# Altium PCB NODE.PcbDoc
Units mil, origin at the board's own origin, x right, y up, seen from the top; angles counter-clockwise.
Board outline 3035 x 2300 mil, 2 copper layers (Top Layer, Bottom Layer); 69 components, 70 nets, 314 pads, 86 vias.
Unrouted connection lines stored in the file: 2.
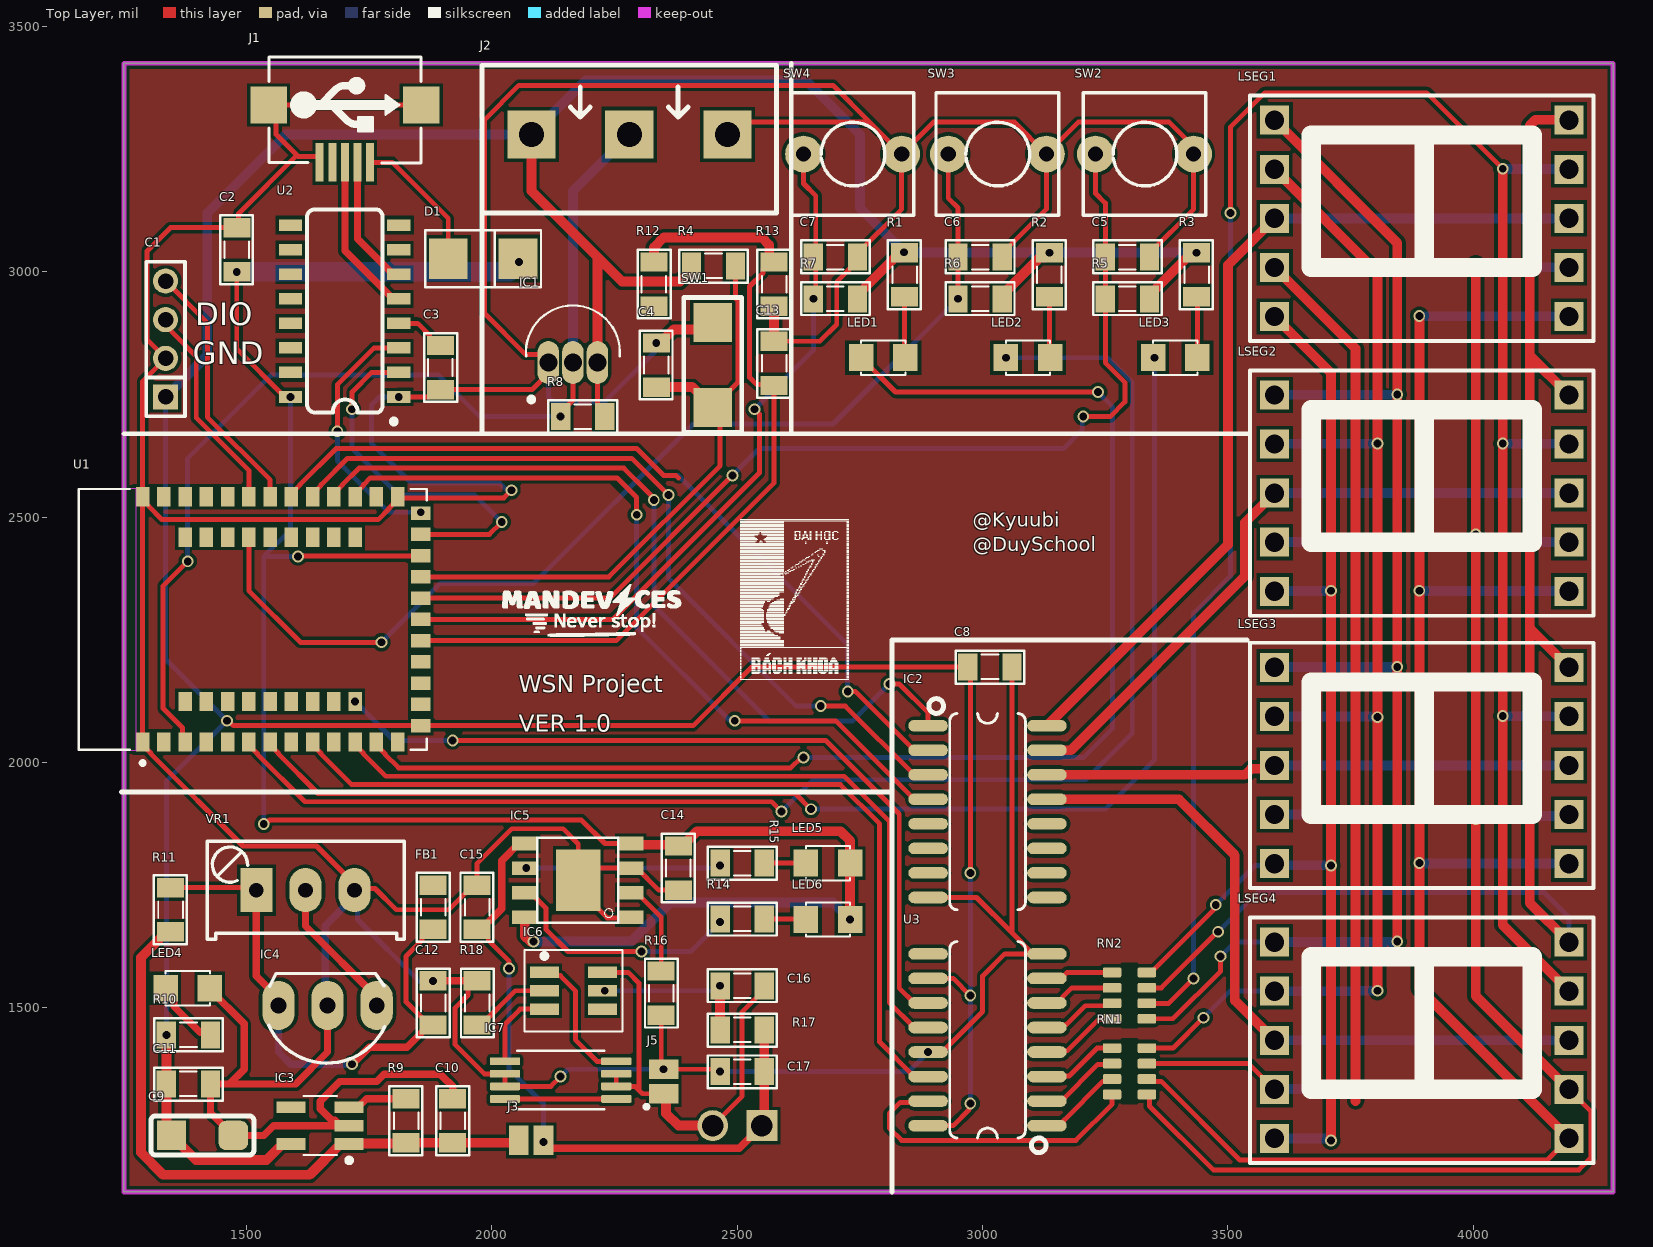
[diagram p0: Top Layer view]
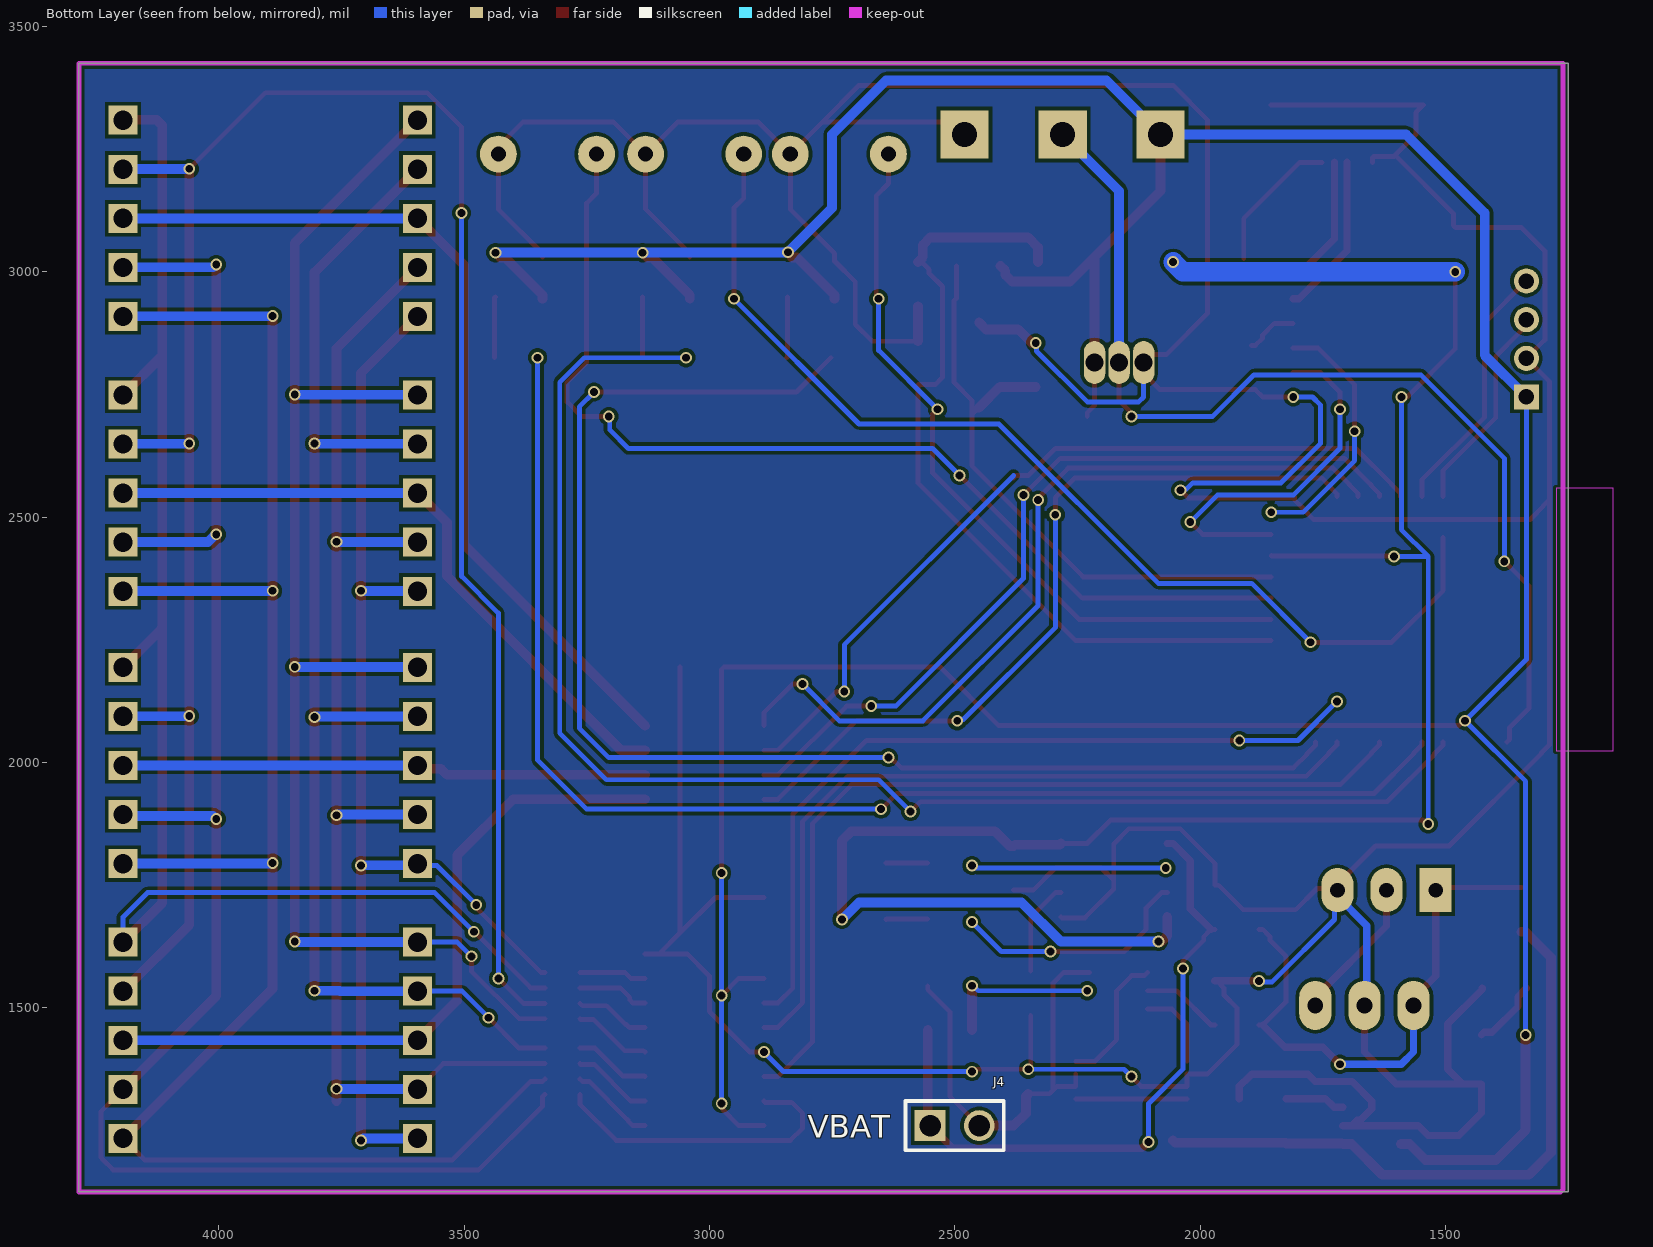
[diagram p1: Bottom Layer view, seen from below]
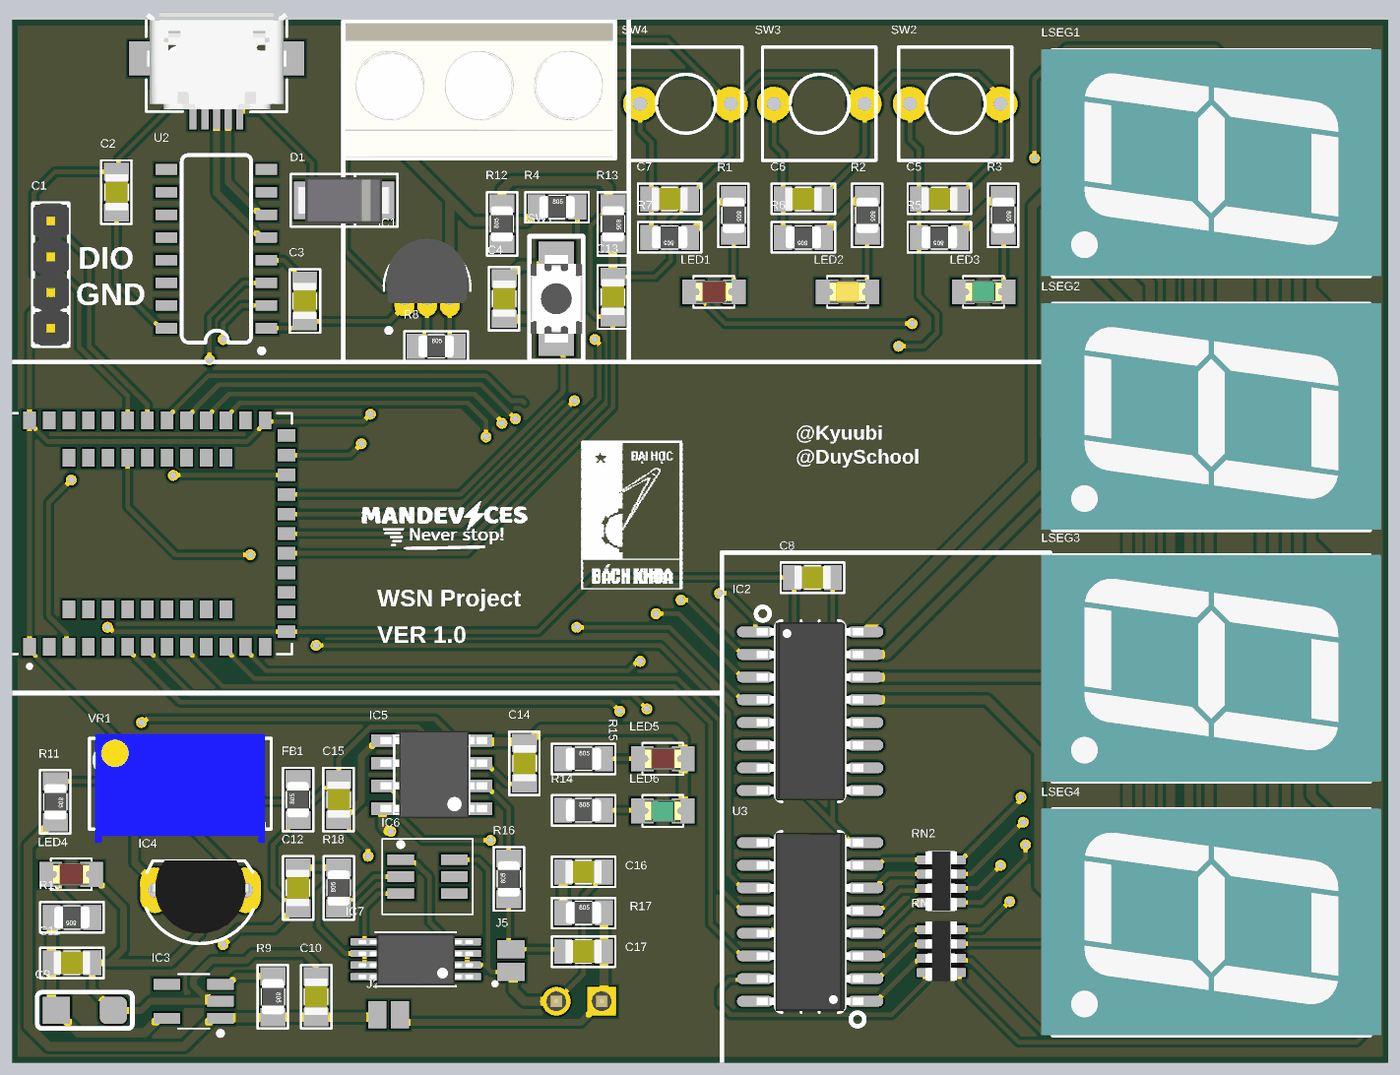
[diagram p2: 3D render of the assembled board from above, using the file's embedded part models]

## Layer stack, top to bottom
Top Solder: solder mask 0.4, Solder Resist, Dk 3.5
Top Layer: signal copper 1.4
Dielectric 1: dielectric 12.6, FR-4, Dk 4.8
Bottom Layer: signal copper 1.4
Bottom Solder: solder mask 0.4, Solder Resist, Dk 3.5

## Board outline
1250,1125 1250,3425 4285,3425 4285,1125

## Design rules (kind name [scope] priority, off if disabled: settings)
Clearance [All] p1: gap=7 ignorepadtopadclearanceinfootprint=TRUE
DiffPairsRouting [All] p1: maxlimit=10 minlimit=10 mostfreqgap=10 toplayer_minwidth=15 toplayer_maxwidth=15 toplayer_prefwidth=15 bottomlayer_minwidth=15 bottomlayer_maxwidth=15 bottomlayer_prefwidth=15 maxuncoupledlength=500
PolygonConnect [All] p1: connectstyle=Relief reliefconductorwidth=10 reliefentries=4 polygonreliefangle="90 Angle" airgapwidth=10
RoutingVias [All] p1: holewidth=16 width=24 viastyle="Through Hole" minholewidth=16 minwidth=24 maxholewidth=20 maxwidth=28
SolderMaskExpansion [All] p1: expansion=4 istentingtop=FALSE
Width [All] p1: maxlimit=40 minlimit=10 preferedwidth=20
29 further rules are at their usual default settings.

## Classes and differential pairs
component class U_Sensor: IC1 J2 R8
component class U_Power: C9 C10 C11 C12 C13 C14 C15 C16 C17 FB1 IC3 IC4 IC5 IC6 IC7 J3 J4 J5 LED4 LED5 LED6 R9 R10 R11 R12 R13 R14 R15 R16 R17 R18 VR1
component class U_Main: C1 C2 C3 C4 C5 C6 C7 D1 J1 LED1 LED2 LED3 R1 R2 R3 R4 R5 R6 R7 SW1 SW2 SW3 SW4 U1 U2
component class U_Display: C8 IC2 LSEG1 LSEG2 LSEG3 LSEG4 RN1 RN2 U3
differential pair D0: +D0_P -D0_N

## Components (designator, comment, footprint, x,y, rotation, side; value= is the part's Value field where it differs from the comment)
C1 "ST_Link" J4-D1T 1335,2863.11 r90 top
C2 "10uF" CAP_0805 1480,3045 r270 top value=33p
C3 "100nF" CAP_0805 1895,2805 r90 top value=33p
C4 "10uF" CAP_0805 2335,2810 r270 top value=33p
C5 "10uF" CAP_0805 3295,3030 r180 top value=33p
C6 "10uF" CAP_0805 2995,3030 r180 top value=33p
C7 "10uF" CAP_0805 2700,3030 r180 top value=33p
C8 "100nF" CAP_0805 3015,2195 r0 top value=33p
C9 "220uF" CAP_TANTALUM_3216 1410,1240 r0 top
C10 "470nF" CAP_0805 1920,1270 r90 top value=33p
C11 "100nF" CAP_0805 1381.5,1345 r0 top value=33p
C12 "100nF" CAP_0805 1880,1510 r90 top value=33p
C13 "100nF" CAP_0805 2575,2813.44 r270 top value=33p
C14 "100nF" CAP_0805 2380,1785 r270 top value=33p
C15 "100nF" CAP_0805 1970,1705 r270 top value=33p
C16 "100nF" CAP_0805 2510,1545 r180 top value=33p
C17 "100nF" CAP_0805 2510,1370 r0 top value=33p
D1 "Diode SMD" DIO-214AC(SMA) 1985,3025 r180 top value=1N5007
FB1 "Ferrit Bead" RES-SMD-0805 1880,1705 r90 top
IC1 "DSB18B20" TO-92 2170,2835 r0 top
IC2 "ULN2003A" SOIC16 3010,1900 r0 top
IC3 "RT9013" SOT23-5 1650,1260 r180 top
IC4 "TL431" qto-92 1665,1505 r180 top
IC5 "TP4056" TP4056 2175,1760 r180 top
IC6 "DW01A" SOT23-6 2165.94,1535 r0 top
IC7 "FS8205A" FS8205A 2140,1355 r180 top
J1 "Debug" USB-M1 1700.51,3223.16 r0 top
J2 "DSB" KF3-5.08 2480,3280 r180 top
J3 "Jumper2" JUMPER2 2055,1230 r180 top
J4 "VBAT_IN" JP2-D1T 2550,1260 r180 bottom
J5 "Jumper2" JUMPER2 2350,1375 r90 top
LED1 "LED" LED-0805-Red 2842.5,2825 r180 top value="LED 3 ly Single Colour"
LED2 "LED" LED-0805-Yellow 3137.5,2825 r180 top value="LED 3 ly Single Colour"
LED3 "LED" LED-0805-Green 3437.5,2825 r180 top value="LED 3 ly Single Colour"
LED4 "" LED-0805-Red 1335,1540 r0 top value="LED 3 ly Single Colour"
LED5 "LED" LED-0805-Red 2730,1795 r180 top value="LED 3 ly Single Colour"
LED6 "LED" LED-0805-Green 2730,1680 r180 top value="LED 3 ly Single Colour"
LSEG1 "7SEG-K" LED7SEG 3895,3110 r270 top
LSEG2 "7SEG-K" LED7SEG 3895,2550 r270 top
LSEG3 "7SEG-K" LED7SEG 3895,1995 r270 top
LSEG4 "7SEG-K" LED7SEG 3895,1435 r270 top
R1 "1k" RES-SMD-0805 2841,2994 r270 top
R2 "1k" RES-SMD-0805 3136,2994 r270 top
R3 "1k" RES-SMD-0805 3436,2994 r270 top
R4 "10k" RES-SMD-0805 2451.56,3012 r0 top
R5 "10k" RES-SMD-0805 3295,2945 r180 top
R6 "10k" RES-SMD-0805 2995,2945 r180 top
R7 "10k" RES-SMD-0805 2700,2945 r180 top
R8 "4k7" RES-SMD-0805 2185,2705 r0 top
R9 "10k" RES-SMD-0805 1825,1270 r270 top
R10 "1k" RES-SMD-0805 1381.5,1445 r180 top
R11 "10k" RES-SMD-0805 1345,1700 r270 top
R12 "30k" RES-SMD-0805 2330,2975 r90 top
R13 "100k" RES-SMD-0805 2575,2975 r270 top
R14 "1k" RES-SMD-0805 2510,1681.5 r0 top
R15 "1k" RES-SMD-0805 2510,1795 r0 top
R16 "1k2" RES-SMD-0805 2345,1530 r90 top
R17 "10R" RES-SMD-0805 2510,1455 r0 top
R18 "1k" RES-SMD-0805 1970,1510 r90 top
RN1 "RP330" RN4-0805 3299.25,1370.75 r180 top
RN2 "RP330" RN4-0805 3299.25,1525 r180 top
SW1 "SW" "SW 3x2x4" 2450,2810 r270 top value="SW chip 2 pin"
SW2 "SW" SW2 3430,3240 r180 top value="SW chip 2 pin"
SW3 "SW" SW2 3130,3240 r180 top value="SW chip 2 pin"
SW4 "SW" SW2 2835,3240 r180 top value="SW chip 2 pin"
U1 "Nrf52840" NRF52840 1387.48,2281.69 r90 top
U2 "CH340C" SOP-16 1700,2920 r90 top
U3 "74HC595" SOIC16 3010,1435 r180 top
VR1 "10K" VR1 1520,1740 r0 top value="VR 10K"

## Footprints (in the part's own frame and the unit in brackets; to place one, negate y for a bottom-side part, rotate by r counter-clockwise, add the part's x,y. Pads: shape width x height; smd on the part's side, far side on the other; paste and mask are expansions set on the pad)
CAP_0805 [mil]
  rect 39.37x55 smd: 1(-45,0) 2(45,0)
  silkscreen extent -70,-34 70,33, body extent -40,-25 40,25, height 24
CAP_TANTALUM_3216 [mil]
  rect 60x60 smd: 1(-62.99,0)
  rrect50% 60x60 smd: 2(62.99,0)
  silkscreen extent -105,-40 105,40, body extent -67,-35 67,35, height 67
DIO-214AC(SMA) [mm] "DO-214AC Diode Smallest Size"
  rect 2x2.1 smd: 1(1.88,-0.051) 2(-1.732,-0.051)
  silkscreen extent -2.92,-1.52 3.07,1.42, body extent -2.5,-1.35 2.7,1.25, height 2.4
FS8205A [mm]
  rrect25% 1.56x0.4 smd: 1(-2.88,1.031) 2(-2.88,0.381) 3(-2.88,-0.269) 4(-2.88,-0.919) 5(2.88,-0.919) 6(2.88,-0.269) 7(2.88,0.381) 8(2.88,1.031)
  silkscreen extent -4.54,-1.46 2.25,1.57, body extent -3.2,-1.4 3.2,1.53, height 1.2
J4-D1T [mm] "4 pins, 1 row, straight, gold plating"
  rect 1.3x1.3 hole 0.8: 1(-3,0)
  round 1.3 hole 0.8: 2(-1,0) 3(1,0) 4(3,0)
  silkscreen extent -4,-1 4,1, body extent -4,-1 4,1, height 6.01
JP2-D1T [mm] "2 pins, 1 row, straight, gold plating"
  rect 1.6x1.6 hole 1.1: 1(0,0)
  round 1.6 hole 1.1: 2(2.54,0)
  silkscreen extent -1.27,-1.27 3.81,1.27, body extent -1.27,-1.27 3.81,1.27, height 8.54
JUMPER2 [mil]
  rect 40x60 smd: 1(-50,0) 2(0,0)
KF3-5.08 [mm]
  rect 2.5x2.5 hole 1.3: 1(0,0) 2(5.08,0) 3(10.147,0)
  silkscreen extent -2.54,-3.58 12.7,4.06, body extent -2.42,-3.51 12.58,3.99, height 10
LED7SEG [mm] "LED7SEG"
  round 1.524 on Top Overlay: 0(4.724,-5.334)
  rect 1.5x1.5 hole 1: 1(-5.055,-7.62) 2(-2.515,-7.62) 3(0.025,-7.62) 4(2.565,-7.62) 5(5.105,-7.62) 6(5.105,7.62) 7(2.565,7.62) 8(0.025,7.62) 9(-2.515,7.62) 10(-5.055,7.62)
  silkscreen extent -6.32,-8.89 6.38,8.89, body extent -6.35,-9.52 6.35,9.53, height 8.03
LED-0805-Green [mil]
  rect 50x55 smd: 1(0,0) 2(90,0)
  silkscreen extent 0,-35 90,35, body extent 5,-25 85,25, height 43
LED-0805-Red [mil]
  rect 50x55 smd: 1(0,0) 2(90,0)
  silkscreen extent 0,-35 90,35, body extent 5,-25 85,25, height 43
LED-0805-Yellow [mil]
  rect 50x55 smd: 1(0,0) 2(90,0)
  silkscreen extent 0,-35 90,35, body extent 5,-25 85,25, height 43
NRF52840 [mm] "SoC Module"
  rect 1x0.7 smd: 1(-6.096,2.525) 2(-6.096,1.425) 3(-6.096,0.325) 4(-6.096,-0.775) 5(-6.096,-1.875) 6(-6.096,-2.975) 7(-6.096,-4.075) 8(-6.096,-5.175) 9(-6.096,-6.275) 10(-6.096,-7.375) 11(-6.096,-8.475) 12(-6.096,-9.575) 13(-6.096,-10.675) 25(6.604,-10.675) 26(6.604,-9.575) 27(6.604,-8.475) 28(6.604,-7.375) 29(6.604,-6.275) 30(6.604,-5.175) 31(6.604,-4.075) 32(6.604,-2.975) 33(6.604,-1.875) 34(6.604,-0.775) 35(6.604,0.325) 36(6.604,1.425) 37(6.604,2.525) 38(-3.996,0.325) 39(-3.996,-0.775) 40(-3.996,-1.875) 41(-3.996,-2.975) 42(-3.996,-4.075) 43(-3.996,-5.175) 44(-3.996,-6.275) 45(-3.996,-7.375) 46(-3.996,-8.475) 47(4.504,0.325) 48(4.504,-0.775) 49(4.504,-1.875) 50(4.504,-2.975) 51(4.504,-4.075) 52(4.504,-5.175) 53(4.504,-6.275) 54(4.504,-7.375) 55(4.504,-8.475)
  rect 0.7x1 smd: 14(-5.246,-11.875) 15(-4.146,-11.875) 16(-3.046,-11.875) 17(-1.946,-11.875) 18(-0.846,-11.875) 19(0.254,-11.875) 20(1.354,-11.875) 21(2.454,-11.875) 22(3.554,-11.875) 23(4.654,-11.875) 24(5.754,-11.875)
  Keep-Out Layer region: 7.054,2.875 -6.546,2.875 -6.546,5.825 7.054,5.825
  Keep-Out Layer region: 7.054,2.875 -6.546,2.875 -6.546,5.825 7.054,5.825
  Keep-Out Layer region: 7.054,2.875 -6.546,2.875 -6.546,5.825 7.054,5.825
  silkscreen extent -7.28,-12.17 7,5.82
qto-92 [mil] "TO-92"
  oval 66x100 hole 32: 1(-100,0) 2(0,0) 3(100,0)
  silkscreen extent -117,-65 120,118, body extent -109,-66 109,95, height 245
RES-SMD-0805 [mil]
  rect 39.37x55 smd: 1(-45,0) 2(45,0)
  silkscreen extent -70,-34 70,33, body extent -39,-25 39,25, height 31
RN4-0805 [mm]
  round 0.254 on Mech15: 0(0,0)
  rrect25% 0.95x0.5 smd: 1(-0.9,1.2) 2(-0.9,0.4) 3(-0.9,-0.4) 4(-0.9,-1.2) 5(0.9,-1.2) 6(0.9,-0.4) 7(0.9,0.4) 8(0.9,1.2)
  Top Layer pour cut-out: -0.4,1.7 0.4,1.7 0.4,-1.7 -0.4,-1.7
  body extent -0.87,-1.68 0.88,1.67, height 0.7
SOIC16 [mm]
  oval 2.05x0.6 smd: 1(-3.075,4.445) 2(-3.075,3.175) 3(-3.075,1.905) 4(-3.075,0.635) 5(-3.075,-0.635) 6(-3.075,-1.905) 7(-3.075,-3.175) 8(-3.075,-4.445) 9(3.075,-4.445) 10(3.075,-3.175) 11(3.075,-1.905) 12(3.075,-0.635) 13(3.075,0.635) 14(3.075,1.905) 15(3.075,3.175) 16(3.075,4.445)
  silkscreen extent -3.03,-5.08 1.96,5.85, body extent -3,-5 3,5, height 1.75
SOP-16 [mm]
  rect 0.6x1.2 smd: 1(-4.445,-2.8) 2(-3.175,-2.8) 3(-1.905,-2.8) 4(-0.635,-2.8) 5(0.635,-2.8) 6(1.905,-2.8) 7(3.175,-2.8) 8(4.445,-2.8) 9(4.445,2.8) 10(3.175,2.8) 11(1.905,2.8) 12(0.635,2.8) 13(-0.635,2.8) 14(-1.905,2.8) 15(-3.175,2.8) 16(-4.445,2.8)
  silkscreen extent -5.84,-2.67 5.26,1.95, body extent -4.95,-3.47 4.95,3.47, height 1.75
SOT23-5 [mm] "SOT23, 5-Leads, Body 3.0x3.0mm (max), Pitch 0.95mm, IPC Medium Density"
  rect 1.5x0.6 smd: 1(-1.5,0.95) 2(-1.5,0) 3(-1.5,-0.95) 4(1.5,-0.95) 5(1.5,0.95)
  silkscreen extent -1.63,-1.52 0.87,1.92, body extent -1.75,-1.52 1.75,1.53, height 1.45
SOT23-6 [mm] "SOT23, 5-Leads, Body 3.0x3.0mm (max), Pitch 0.95mm, IPC Medium Density"
  rect 1.5x0.6 smd: 1(-1.5,0.95) 2(-1.5,0) 3(-1.5,-0.95) 4(1.5,-0.95) 5(1.5,0) 6(1.5,0.95)
  silkscreen extent -2.54,-2.11 2.54,2.11, body extent -1.75,-1.52 1.75,1.53, height 1.45
SW2 [mil] "SW button 2pin, 250x 250 mil"
  round 75 hole 31: 1(0,0) 2(200,0)
  silkscreen extent -25,-125 225,125
"SW 3x2x4" [mm]
  rect 2x2 smd: 1(-2.2,0) 2(2.2,0)
  silkscreen extent -3.5,-1.5 3.5,1.5, body extent -2.45,-1.45 2.45,1.45, height 2
TO-92 [mm]
  oval 1.11x2.22 hole 0.93: 1(-1.397,-0.506) 2(-0.127,-0.506) 3(1.143,-0.506)
  silkscreen extent -2.56,-2.54 2.3,2.45, body extent -2.41,-0.89 2.16,2.73, height 20.45
TP4056 [mm]
  rect 1.3x0.7 smd: 1(-2.75,1.905) 2(-2.75,0.635) 3(-2.75,-0.635) 4(-2.75,-1.905) 5(2.75,-1.905) 6(2.75,-0.635) 7(2.75,0.635) 8(2.75,1.905)
  rect 2.3x3.2 smd: 3(-0.025,0)
  silkscreen extent -2.1,-2.2 2.1,2.2, body extent -3.13,-2.45 2.87,2.45, height 1.75
USB-M1 [mm]
  rect 0.4x2 smd: 1(1.3,0) 2(0.65,0) 3(0,0) 4(-0.65,0) 5(-1.321,0)
  rect 1.9x1.9 smd: 5(-3.95,2.968) 5(3.95,2.968)
  silkscreen extent -3.94,-0.03 3.94,5.46, body extent -3.98,0.11 4,5.54, height 2.71
VR1 [mil] "Variable Resistor"
  rect 65x90 hole 30: 1(0,0)
  oval 65x90 hole 30: 2(100,0) 3(200,0)
  silkscreen extent -100,-100 301,100, body extent -88,-130 288,110, height 455

## Part data
C1: library part JP4x1-2.0, "WR-PHD 2.00 mm Socket Header", Manufacturer="W¨¹rth Elektronik eiSos GmbH", partNo=62000411821, ComponentLink1 Description=Manufacturer, ComponentLink1URL=http://www.we-online.com, ComponentLink2 Description=Datasheet, ComponentLink2URL=http://katalog.we-online.de/em/datasheet/6200xx11821.pdf, Created by="Karrer Zheng", Created Date="2 April 2013", NoPins=04
C2 C3 C4 C5 C6 C7 C8 C10 C11 C12 C13 C14 C15 C16 C17: library part CapSMD, "Capacitor", LatestRevisionDate=17-Jul-2002, LatestRevisionNote="Re-released for DXP Platform.", PackageReference=RAD-0.3, Published=8-Jun-2000, Publisher="Altium Limited"
C9: library part "Cap Pol", "Polarized Capacitor (Axial)", LatestRevisionDate=17-Jul-2002, LatestRevisionNote="Re-released for DXP Platform.", PackageReference=POLAR0.8, Published=8-Jun-2000, Publisher="Altium Limited"
D1: "Default Diode", Code - JEDEC=DO-214-AB, Published=8-Jun-2000, Publisher="Altium Limited", Revision="July-2002: Re-released for DXP Platform."
FB1: "Generic Ferrit Bead"
IC1: "https://linhkien.cxt.vn/3083-ds18b20-temperature-sensors-55-to-125-c-to-92-3.html"
IC2: "High-Voltage, High-Current Darlington Array", LatestRevisionNote="Stylized 3D Model Added.", Publisher="Altium Limited"
IC3: "RT9013-33GB IC REG LINEAR 3.3V 500mA SOT23-5"
IC4: "Programmable Shunt Regulator"
IC5: "Complete single cell Li-Ion battery with a constant current / constant voltage linear charger"
IC6: "One Cell Lithium-ion/Polymer Battery Protection IC"
J1: library part USB-5, Manufacturer=FCI, Manufacturer Part Number=10118193-0001LF, Supplier Part Number 1=609-4616-1-ND, .Checked PCB=RF, .Checked SCH=MM, .Creator=MM, Category="Connectors, Interconnects", ComponentLink1Description=http://portal.fciconnect.com/Comergent//fci/drawing/10118193.pdf, ComponentLink1URL=http://portal.fciconnect.com/Comergent//fci/drawing/10118193.pdf, Connector Type="USB - micro B", Features="Shielded, Solder Retention", Gender=Receptacle, Ingress Protection=-, Mounting Type="Surface Mount, Right Angle, Horizontal", Number of Contacts=5, Packaging="Cut Tape (CT)", Pricing 1="1=0.46, 10=0.433, 25=0.3712, 50=0.3156, 100=0.3032, 250=0.27224, 500=0.25988 (USD)", RoHS="RoHS Compliant", Specifications="USB 2.0", Stock 1=28642, Supplier 1=Digi-Key
J2: library part KF3, Manufacturer="Würth Elektronik eiSos GmbH", partNo=691103110003, ComponentLink1 Description=Manufacturer, ComponentLink1URL=http://www.we-online.com, ComponentLink2 Description=Datasheet, ComponentLink2URL=http://katalog.we-online.de/em/datasheet/6911031100xx.pdf, Created by="Karrer Zheng", Created Date="29 October 2013", NoPins=3
J3 J5: "Jumper, 2-Pin"
J4: library part JP2, "WR-PHD 2.54 mm Angled Socket Header", Manufacturer="W¨¹rth Elektronik eiSos GmbH", partNo=613002143121, ComponentLink1 Description=Manufacturer, ComponentLink1URL=http://www.we-online.com, ComponentLink2 Description=Datasheet, ComponentLink2URL=http://katalog.we-online.de/em/datasheet/6130xx143121.pdf, Created by="Karrer Zheng", Created Date="29 March 2013", NoPins=02
LED1 LED2 LED3 LED5 LED6: "LED Single colour Green and Red"
LED4: library part LED, "LED Single colour Green and Red"
LSEG1 LSEG2 LSEG3 LSEG4: library part LED7SEG-K, "14.2 mm General Purpose Blue 7-Segment Display: CC, RH DP, Gray Surface", Colour=Blue, PackageDocument=24-Sep-2002, ComponentLink1Description="Manufacturer Link", ComponentLink1URL=http://www.agilent.com/, DatasheetDocument=24-Sep-2002, LatestRevisionDate=17-Dec-2003, LatestRevisionNote="Schematic revised, PCB Footprint replaced.", MinimumIntensity="2020 ucd", Note="IF = 10 mA", PackageReference=H, Published=8-Jun-2000, Publisher="Altium Limited"
R1 R2 R3 R4 R5 R6 R7 R8 R10 R17 R18: library part "Resistor - SMD", "Resistor SMD", Manufacturer="Generic Components", Class=Passive, Published=08/06/2000, Publisher="Altium Hobart Technology Centre"
R9 R11 R12 R13 R14 R15 R16: library part "Resistor - SMD", "Resistor", Manufacturer="Generic Components", Class=Passive, Published=08/06/2000, Publisher="Altium Hobart Technology Centre"
RN1 RN2: library part RN4-Dual
SW1 SW2 SW3 SW4: library part SW2, "Switch button 2 pin"
U1: "Module SoC"
U2: "USB to serial chip CH340", Package=Package, Availability=Unavailable, Check_prices=https://www.snapeda.com/parts/CH340C/WCH/view-part/5428851/?ref=eda, MF=WCH, MP=CH340C, Price=None, SnapEDA_Link=https://www.snapeda.com/parts/CH340C/WCH/view-part/5428851/?ref=snap
U3: "8-bit Serial-Input/Serial or Parallel Output Shift Register with Latched 3-state Outputs"
VR1: library part VR, "Var Resistor"

## Via types
v1: diameter 24, hole 16, Top Layer to Bottom Layer, 86 vias

## Nets (pads, with @x,y where several pads share a name; then routed paths per layer and width w, separated by ;. In a path a pad name is that pad's centre, name@x,y a point inside that pad or via, vN(x,y) a via of type N, cw(c..) or ccw(c..) an arc to the next point about the centre after c; other vN are vias at no path point)
3V3: C1.1 C8.1 C9.1 C11.1 IC1.3 IC3.5 J2.3 R1.1 R2.1 R3.1 R4.1 R5.1 R6.1 R7.1 R8.2 R10.2 U1.14 U3.10 U3.16 | length 8587.3
  Top Layer w10: v1(1460,2085) 1463.02,2085 1472.86,2075.16 U1.14 2410.16,2075.16 2530,2195 C8.1 2975,2190 v1(2975,1775) ; IC1.3 2215,2727.81 2230,2712.81 R8.2 ; U3.16 2940,1260 2972.32,1292.32 2972.32,1302.32 v1(2975,1305) ; U3.10 2940,1560 v1(2975,1525)
  Top Layer w20: v1(1336.5,1445) 1336.5,1250.51 C9.1 1397.01,1190 1540.63,1190 1573.23,1222.6 IC3.5 ; J2.3 2080.5,3164.5 2215,3030 ; IC1.3 2215,3030 ; R4.1 2396.87,3002.32 2396.87,2993.69 2383.18,2980 2265,2980 2215,3030 ; R7.1 2745,2952.81 2821.5,3029.32 R1.1@2831.31,3029.32 ; R6.1 3040,2952.81 3116.5,3029.32 3126.31,3029.32 v1(3136,3039) ; R5.1 3340,2952.81 3416.5,3029.32 R3.1@3426.31,3029.32
  Bottom Layer w10: C1.1 1335,2210 v1(1460,2085) 1336.5,1961.5 v1(1336.5,1445) ; v1(2975,1305) v1(2975,1525) v1(2975,1775)
  Bottom Layer w20: C1.1 1420,2830 1420,3120 1580,3280 J2.3 2190.5,3390 2640,3390 2750,3280 2750,3130 v1(2840,3040) 2840.5,3039.5 3435.5,3039.5 v1(3436,3039)
5V: C2.2 C14.1 D1.2 IC5.4 IC5.8 LED5.1 LED6.1 U1.22 U2.16 | length 4255.2
  Top Layer w10: v1(1480,3000) 1480,2842.95 U2.16@1577.95,2745 ; v1(1535,1875) 1538.79,1875 1546.79,1883 2182.34,1883 2230.34,1835 IC5.4 ; v1(1605,2420) 1605.81,2420.81 1854.19,2420.81 U1.22
  Top Layer w20: D1.2 2055,3025.2 v1(2055,3020) ; IC5.8 2066.73,1646.72 2078.45,1635 v1(2085,1635) ; IC5.4 2285.77,1832.5 2377.5,1832.5 C14.1 2387.81,1830 2417.81,1860 2710.36,1860 2729.58,1840.78 2729.58,1795.42 LED5.1 v1(2730,1680)
  Bottom Layer w10: v1(1535,1875) 1535,2420 ; v1(1589.76,2745) 1589.76,2474.76 1535,2420 ; v1(1605,2420) 1535,2420
  Bottom Layer w20: v1(2085,1635) 2283.99,1635 2363.99,1715 2695,1715 v1(2730,1680)
  Bottom Layer w40: v1(1480,3000) 2035,3000 v1(2055,3020)
A: LSEG1.7 LSEG2.7 LSEG3.7 LSEG4.7 RN1.1 | length 3490.1
  Top Layer w10: RN1.1 3335.32,1323.5 3340.17,1318.66 3340.17,1299.83 3470,1170 4215,1170 4238.07,1193.07 4239.6,1194.6 4239.6,1289.4 LSEG4.7
  Top Layer w20: v1(4005,3015) v1(4005,2465) v1(4005,1885) 4005,1524 LSEG4.7
  Bottom Layer w20: v1(4005,1885) 4006.08,1885 4011.85,1890.77 4191.77,1890.77 LSEG3.7 ; v1(4005,2465) 4006.08,2465 4021.58,2449.5 4194.5,2449.5 LSEG2.7 ; v1(4005,3015) 4006.08,3015 4011.58,3009.5 4194.5,3009.5 LSEG1.7
B: LSEG1.6 LSEG2.6 LSEG3.6 LSEG4.6 RN1.2 | length 3665.5
  Top Layer w10: RN1.2 3339.53,1350.16 3363.98,1350.16 3524.14,1190 4151,1190 LSEG4.6
  Top Layer w20: v1(3890,2910) v1(3890,1795) 3890,1539 LSEG4.6
  Bottom Layer w20: v1(3890,1795) 3890.5,1794.5 4194.5,1794.5 LSEG3.6 ; v1(3890,2350) 3890.5,2349.5 4194.5,2349.5 LSEG2.6 ; v1(3890,2910) 3890.5,2909.5 4194.5,2909.5 LSEG1.6
C: LSEG1.4 LSEG2.4 LSEG3.4 LSEG4.4 RN1.3 | length 2545.9
  Top Layer w10: RN1.3 3542.5,1386.5 LSEG4.4
  Top Layer w20: LSEG1.4 3760,2844 v1(3760,2450) v1(3760,1892.5) v1(3760,1335) 3760,1310
  Bottom Layer w20: LSEG4.4 3595.5,1334.5 3759.5,1334.5 v1(3760,1335) ; LSEG3.4 3757.42,1894 3758.92,1892.5 v1(3760,1892.5) ; LSEG2.4 3595.5,2449.5 3759.5,2449.5 v1(3760,2450)
D: LSEG1.2 LSEG2.2 LSEG3.2 LSEG4.2 RN1.4 | length 2700.8
  Top Layer w10: RN1.4 3387.99,1417.99 v1(3450,1480)
  Top Layer w20: LSEG1.2 3805,2999 v1(3805,2650) v1(3805,2092.5) v1(3805,1535)
  Bottom Layer w10: v1(3450,1480) 3504,1534 LSEG4.2
  Bottom Layer w20: LSEG4.2 3753,1534 3754,1535 v1(3805,1535) ; LSEG3.2 3802.42,2094 3803.92,2092.5 v1(3805,2092.5) ; LSEG2.2 3595.5,2649.5 3804.5,2649.5 v1(3805,2650)
D0_N: J1.2 U2.6 | length 269.9
  Top Layer w15: J1.2 1726.1,3067.32 1798.43,2995 U2.6
D0_P: J1.3 U2.5 | length 330.5
  Top Layer w15: J1.3 1700.51,3042.91 1798.43,2945 U2.5
DIG0: IC2.13 LSEG4.3 LSEG4.8 | length 1440.7
  Top Layer w20: IC2.13 3400,1925 3514,1811 3514,1515 LSEG4.3
  Bottom Layer w20: LSEG4.3 LSEG4.8
DIG1: IC2.14 LSEG3.3 LSEG3.8 | length 1071.8
  Top Layer w20: IC2.14 3535,1975 3547.19,1987.19 3588.19,1987.19 LSEG3.3
  Bottom Layer w20: LSEG3.3 LSEG3.8
DIG2: IC2.15 LSEG2.3 LSEG2.8 | length 1344.8
  Top Layer w20: IC2.15 3180,2025 3535,2380 3535,2489 LSEG2.3
  Bottom Layer w20: LSEG2.3 LSEG2.8
DIG3: IC2.16 LSEG1.3 LSEG1.8 | length 1826.2
  Top Layer w20: IC2.16 3500,2443.94 3500,3014 LSEG1.3
  Bottom Layer w20: LSEG1.3 LSEG1.8
DP: LSEG1.5 LSEG2.5 LSEG3.5 LSEG4.5 RN2.4 | length 2431.2
  Top Layer w10: RN2.4 3343.54,1572.24 3475,1703.7 v1(3475,1710)
  Top Layer w20: LSEG1.5 3710,2794 v1(3710,2350) v1(3710,1790) v1(3710,1230)
  Bottom Layer w10: v1(3475,1710) 3555,1790 3591,1790 LSEG3.5
  Bottom Layer w20: LSEG4.5 3704.92,1234 3708.92,1230 v1(3710,1230) ; LSEG3.5 3598.23,1790.77 3709.23,1790.77 v1(3710,1790) ; LSEG2.5 3595.5,2349.5 3709.5,2349.5 v1(3710,2350)
E: LSEG1.1 LSEG2.1 LSEG3.1 LSEG4.1 RN2.1 | length 2871.4
  Top Layer w10: RN2.1 3387.76,1477.76 3485,1575 v1(3485,1605)
  Top Layer w20: LSEG1.1 3845,3059 v1(3845,2750) v1(3845,2195) v1(3845,1635)
  Bottom Layer w10: v1(3485,1605) 3514,1634 LSEG4.1
  Bottom Layer w20: LSEG4.1 3595.5,1634.5 3844.5,1634.5 v1(3845,1635) ; LSEG3.1 3595.5,2194.5 3844.5,2194.5 v1(3845,2195) ; LSEG2.1 3595.5,2749.5 3844.5,2749.5 v1(3845,2750)
F: LSEG1.9 LSEG2.9 LSEG3.9 LSEG4.9 RN2.2 | length 4668.8
  Top Layer w10: RN2.2 3379.25,1509.25 v1(3430,1560) ; v1(3505,3120) 3505,3295.03 3574.97,3365 3905,3365 v1(4060,3210)
  Top Layer w20: v1(4060,3210) v1(4060,2650) v1(4060,2095) 4060,1669 LSEG4.9
  Bottom Layer w10: v1(3430,1560) 3430,2304.39 3505,2379.39 v1(3505,3120)
  Bottom Layer w20: v1(4060,2095) 4060.5,2094.5 4194.5,2094.5 LSEG3.9 ; v1(4060,2650) 4060.5,2649.5 4194.5,2649.5 LSEG2.9 ; v1(4060,3210) 4060.5,3209.5 4194.5,3209.5 LSEG1.9
G: LSEG1.10 LSEG2.10 LSEG3.10 LSEG4.10 RN2.3 | length 3021
  Top Layer w10: RN2.3 3364.25,1540.75 3479.25,1655.75 v1(3480,1655)
  Top Layer w20: LSEG4.10 4115,1714 4115,2271.5 ; LSEG3.10 4117.5,2271.5 4115,2271.5 ; LSEG2.10 4115,2829 ; LSEG1.10 4194,3310 4126.72,3310 4115,3298.28 4115,2829 ; 4115,2271.5 4115,2829
  Bottom Layer w10: v1(3480,1655) 3560,1735 4145,1735 4195,1685 LSEG4.10
GND: C1.2 C2.1 C3.1 C4.1 C5.1 C6.1 C7.1 C8.2 C9.2 C10.2 C11.2 C12.2 C13.1 C14.2 C15.1 C17.1 IC1.1 IC2.8 IC3.2 IC4.2 IC5.1 IC5.3 IC7.6 IC7.7 J1.5 J2.1 J5.2 LED4.2 R13.2 R16.1 R18.2 SW1.1 SW2.1 SW3.1 SW4.1 U1.1 U1.25 U1.37 U2.1 U3.8 U3.13 VR1.3 | length 13716.7
  Top Layer w10: 1602.5,3237.5 1483.83,3118.83 1483.83,3093.83 C2.1 1345,3090 1297.41,3042.41 1297.41,2861.33 C1.2 1288.07,2776.81 U1.37 U1.37@1288.07,2535.79 ; J1.5@1648.51,3223.16 1648.51,3232.13 1645.64,3235 1605,3235 1560,3280 1560,3325 1545,3340 J1.5@1856.02,3340 ; U2.1 1872.19,2745 1887.19,2760 C3.1 2081.78,2760 2115,2793.22 IC1.1 2115,2816.35 2099.43,2831.92 2068.08,2831.92 1985,2915 1985,3310 2055,3380 2695,3380 2770,3305 ; R18.2@1965.86,1555 1951.17,1540.31 1951.17,1526.17 1925,1500 1925,1425 1984.41,1365.59 IC7.6 IC7.7 2120,1340 v1(2140,1360) ; v1(2040,2555) 2024.23,2539.23 1810.22,2539.23 U1.25 1807.76,2535.79 1790.27,2518.3 1790.27,2517.08 1768.19,2495 1327.64,2495 1300.6,2522.04 1300.6,2523.26 U1.37@1288.07,2535.79 ; IC5.1 2281.8,1683.54 2234.75,1683.54 2176,1742.28 IC5.3@2176,1760 ; R16.1 2345,1380 v1(2350,1375) 2460,1375 v1(2465,1370) ; C14.2 2340.08,1740 2295.08,1785 2283.27,1785 2201,1785 IC5.3@2176,1760 ; J2.1 2505,3305 2770,3305 ; C13.1 2668.45,2858.45 2702.66,2892.66 2702.66,2979.84 2745,3022.19 C7.1 2745,3037.81 2835,3127.81 SW4.1 ; v1(2888.94,1410) 2917.48,1410 3000,1492.52 3000,1565 3045,1610 U3.8@3102.52,1610 ; IC2.8 2987.52,1725 3058.76,1653.76 ; C6.1 3040,3037.81 3130,3127.81 SW3.1 ; C8.2 3060,1655 3058.76,1653.76 ; U3.8 U3.8@3102.52,1610 ; C5.1 3340,3037.81 3430,3127.81 SW2.1 3430,3255 3380,3305 3195,3305 SW3.1 ; U1.37@1288.07,2535.79 U1.1 1288.07,2035.79 1305.56,2018.3 1305.56,2017.08 1492.64,1830 1642.5,1830 1720,1752.5 VR1.3 1723.36,1743.36 1761.64,1743.36 1805,1700 1912.18,1700 1962.19,1750 C15.1 1970,1794.61 2040.39,1865 2145,1865 2176,1834 IC5.3@2176,1760 ; 2770,3305 SW4.1 ; SW4.1 2900,3305 3065,3305 SW3.1 ; 3058.76,1653.76 U3.8@3102.52,1610
  Top Layer w15: LED4.2 1425,1537.5 1495,1467.5 1495,1375 1465,1345 ; IC4.2 1665,1410 1600,1345 1465,1345 ; IC3.2 IC3.2@1691.34,1260 ; v1(1880,1555) 1965.86,1555 R18.2 ; C10.2 1920,1340 1899.99,1360.01 1895,1365 1780,1365 1765,1350 1690,1350 1650,1310 1650,1294.61 1673.52,1271.09 1680.25,1271.09 IC3.2@1691.34,1260 ; 1465,1345 C11.2 1426.5,1286.49 C9.2 1535,1240 1555,1260 IC3.2@1691.34,1260
  Top Layer w20: v1(2335,2855) 2342.81,2855 2370.44,2882.63 2436.01,2882.63 SW1.1 ; C13.1 R13.2
  Bottom Layer w10: VR1.3@1726,1734 1726,1680 1853,1553 1878,1553 v1(1880,1555) ; v1(1810,2745) 1770.86,2745 1755,2729.14 1755,2650 1835,2570 2015,2570 2027.32,2557.68 2037.32,2557.68 v1(2040,2555) ; IC1.1 2115,2745 2125,2735 2230,2735 2333.41,2838.41 2333.41,2853.41 v1(2335,2855) ; v1(2140,1360) 2155,1375 v1(2350,1375) ; v1(2465,1370) 2848.94,1370 v1(2888.94,1410)
  Bottom Layer w15: IC4.2 1660,1510 1660,1667.5 1720,1727.5 VR1.3
NetC3_2: C3.2 U2.4 | length 107.3
  Top Layer w10: U2.4 1848.86,2895 1872.5,2871.36 1872.5,2864.68 1887.19,2850 C3.2
NetC12_1: C12.1 FB1.1 IC4.3 R11.1 VR1.1 | length 1126.1
  Top Layer w10: R11.1 1515,1745 VR1.1 ; C12.1 1872.19,1465 1825,1512.18 1825,1605 1857.5,1637.5 1857.5,1645.31 1872.19,1660 FB1.1
  Top Layer w15: VR1.1 1520,1565 1565,1520 IC4.3 ; v1(1715,1385) 1749.77,1419.77 1826.95,1419.77 C12.1@1872.19,1465
  Bottom Layer w15: IC4.3 1565,1410 1590,1385 v1(1715,1385)
NetC13_2: C13.2 R12.2 R13.1 U1.18 | length 1687.3
  Top Layer w10: U1.18 2253.39,2248.39 2575,2570 C13.2 2573.45,2770 2540,2770 2525,2785 2525,2970 2552.5,2997.5 2552.5,3005.32 2567.19,3020 2574.69,3020 R13.1
  Top Layer w20: R12.2 2330,3050 2350,3070 2550,3070 2565,3055 2565,3029.69 R13.1@2574.69,3020
NetC16_1: C16.1 IC6.6 IC7.2 IC7.3 J4.2 J5.1 | length 905.9
  Top Layer w10: IC6.6 2277.6,1572.4 2299.38,1550.62 2299.38,1332.45 ; IC7.3 IC7.2 2253.49,1339.9 2291.93,1339.9 2299.38,1332.45 ; J5.1 2306.82,1325 2299.38,1332.45 ; J4.2 2510,1320 2510,1492.18 2555,1537.19 C16.1
  Top Layer w20: J5.1 2355,1320 2355,1285 2380,1260 J4.2
NetC16_2: C16.2 IC6.5 R17.1 | length 334.1
  Top Layer w10: IC6.5 v1(2230,1535)
  Top Layer w20: R17.1 v1(2465,1545)
  Bottom Layer w10: v1(2230,1535) 2452.14,1535 2462.14,1545 v1(2465,1545)
NetD1_1: D1.1 J1.1 | length 288.6
  Top Layer w10: J1.1 1796.84,3223.16 1911,3109 D1.1
NetIC1_2: IC1.2 J2.2 R8.1 U1.3 | length 2108.3
  Top Layer w10: U1.3 1369.48,2046.9 1369.48,2070.52 1330,2110 1330,2360 v1(1380,2410) ; R8.1@2140,2712.81 2165,2737.81 IC1.2
  Bottom Layer w10: v1(1380,2410) 1380,2620 1550,2790 1890,2790 1975,2705 v1(2140,2705)
  Bottom Layer w20: IC1.2 2165,3165 J2.2
NetIC3_3: IC3.3 R9.1 | length 123.2
  Top Layer w15: IC3.3 1726.77,1297.4 1744.37,1315 R9.1
NetIC4_1: IC4.1 VR1.2 | length 295.1
  Top Layer w15: VR1.2 1620,1667 1765,1522 IC4.1
NetIC5_2: IC5.2 R16.2 | length 192.5
  Top Layer w10: IC5.2 2295.08,1735 2345,1685.08 R16.2
NetIC5_6: IC5.6 R15.1 | length 402.1
  Top Layer w10: v1(2465,1790) R15.1
  Bottom Layer w10: v1(2070,1785) 2456.21,1785 2461.21,1790 v1(2465,1790)
NetIC5_7: IC5.7 R14.1 | length 498.3
  Top Layer w10: IC5.7 2078.54,1735 2110,1703.54 2110,1660 2155,1615 v1(2305,1615)
  Bottom Layer w10: v1(2305,1615) 2405,1615 v1(2465,1675)
NetIC6_1: IC6.1 IC7.4 | length 280.5
  Top Layer w10: IC6.1 2113.7,1565.59 2139.41,1565.59 2170,1535 2170,1435 2214.28,1390.72 2252.92,1390.72 IC7.4
NetIC6_2: IC6.2 R18.1 | length 165.9
  Top Layer w10: R18.1 1977.81,1465 2047.82,1535 IC6.2
NetIC6_3: IC6.3 IC7.5 | length 168.5
  Top Layer w10: IC7.5 2026.61,1466.61 2057.6,1497.6 IC6.3
NetIC7_1: IC7.1 IC7.8 | length 226.8
  Top Layer w10: IC7.8 IC7.1
NetLED1_1: LED1.1 R1.2 | length 124.6
  Top Layer w10: R1.2 2841,2826.5 LED1.1
NetLED1_2: LED1.2 U1.12 | length 2769
  Top Layer w10: U1.12 1764.45,2035.79 1781.93,2018.3 1781.93,2017.08 1810.01,1989 2609,1989 2630,2010 v1(2635,2010) ; LED1.2 2822.5,2755 v1(3235,2755)
  Bottom Layer w10: v1(2635,2010) 3205,2010 3265,2070 3265,2725 v1(3235,2755)
NetLED2_1: LED2.1 R2.2 | length 124.6
  Top Layer w10: R2.2 3136,2826.5 LED2.1
NetLED2_2: LED2.2 U1.6 | length 2922.7
  Top Layer w10: U1.6 1504.61,2035.79 1522.09,2018.3 1522.09,2017.08 1619.17,1920 2570,1920 v1(2590,1900)
  Bottom Layer w10: v1(2590,1900) 2655,1965 3210,1965 3305,2060 3305,2775 3255,2825 v1(3047.5,2825)
NetLED3_1: LED3.1 R3.2 | length 124.6
  Top Layer w10: R3.2 3437.5,2947.5 LED3.1
NetLED3_2: LED3.2 U1.7 | length 2726.8
  Top Layer w10: U1.7 1547.91,2035.79 1565.4,2018.3 1565.4,2017.08 1645.48,1937 2618,1937 v1(2650,1905) ; LED3.2 v1(3350,2825)
  Bottom Layer w10: v1(2650,1905) 3250,1905 3350,2005 v1(3350,2825)
NetLED4_1: LED4.1 R10.1 | length 142.6
  Top Layer w15: LED4.1 1352.16,1522.84 1352.16,1502.84 1405,1450 1421.5,1450 R10.1
NetLED5_2: LED5.2 R15.2 | length 85
  Top Layer w10: R15.2 LED5.2
NetLED6_2: LED6.2 R14.2 | length 85.6
  Top Layer w10: R14.2 2638.5,1681.5 LED6.2
NetRN1_5: RN1.5 U3.3 | length 156.8
  Top Layer w10: U3.3 3132.32,1361.26 3176.26,1361.26 3232.99,1417.99 RN1.5
NetRN1_6: RN1.6 U3.2 | length 164.4
  Top Layer w10: U3.2 3160,1310 3235,1385 3262.32,1385 RN1.6
NetRN1_7: RN1.7 U3.1 | length 172.7
  Top Layer w10: U3.1 3155.92,1260 3166.25,1270.33 3166.25,1271.28 3245.13,1350.16 3258.98,1350.16 RN1.7
NetRN1_8: RN1.8 U3.15 | length 633.7
  Top Layer w10: U3.15 2886.33,1307.39 2832.39,1307.39 2810,1285 2810,1255 2835,1230 3190,1230 3263.82,1303.82 RN1.8
NetRN2_5: RN2.5 U3.7 | length 137.8
  Top Layer w10: U3.7 3160.03,1560 3172.28,1572.24 RN2.5
NetRN2_6: RN2.6 U3.6 | length 148.4
  Top Layer w10: U3.6 3155.92,1510 3162.21,1516.29 3162.21,1521.31 3181.65,1540.75 RN2.6
NetRN2_7: RN2.7 U3.5 | length 153.2
  Top Layer w10: U3.5 3163.29,1460 3169.55,1466.26 3171.26,1466.26 3209.41,1504.41 3258.98,1504.41 RN2.7
NetRN2_8: RN2.8 U3.4 | length 160.8
  Top Layer w10: U3.4 3133.67,1412.61 3172.61,1412.61 3236.63,1476.63 3262.69,1476.63 RN2.8
NetU1_9: U1.9 U3.14 | length 1801.4
  Top Layer w10: U1.9 1634.53,2035.79 1652.01,2018.3 1652.01,2017.08 1714.09,1955 2710,1955 2790,1875 2790,1430.39 2860.39,1360 U3.14
NetU1_11: U1.11 U3.12 | length 1629.4
  Top Layer w10: U1.11 1721.14,2035.79 1738.63,2018.3 1738.63,2017.08 1783.71,1972 2718,1972 2810,1880 2810,1510.39 2860.39,1460 U3.12
NetU1_46: U1.46 U3.11 | length 1630
  Top Layer w10: v1(1920,2045) 2680,2045 2830,1895 2830,1540.39 2860.39,1510 U3.11
  Bottom Layer w10: v1(1721.14,2124.37) 1800.51,2045 v1(1920,2045)
nRST: C4.2 R4.2 SW1.2 U1.21 | length 1281.4
  Top Layer w10: U1.21 2238.31,2378.31 2465,2605 SW1.2@2465,2708.39 ; SW1.2 SW1.2@2465,2708.39 ; R4.2 2496.55,2945.77 2501.37,2940.95 2501.37,2774.76 2465,2738.39 SW1.2@2465,2708.39
  Top Layer w20: C4.2 2408.38,2765 SW1.2
p0.19: C5.2 R5.2 SW2.2 U1.20 | length 2145.2
  Top Layer w10: U1.20 2240,2335 v1(2490,2585) ; v1(3205,2705) 3260,2705 3290,2735 3290,2775 3250,2815 R5.2 C5.2 3250,3140 3230,3160 SW2.2
  Bottom Layer w10: v1(2490,2585) 2545,2640 3165,2640 3203,2678 3203,2703 v1(3205,2705)
p0.20: C6.2 R6.2 SW3.2 U1.50 | length 2190.9
  Top Layer w10: U1.50 1504.61,2350.39 1610,2245 v1(1775,2245) ; SW3.2 2930,3150 2950,3130 C6.2 v1(2950,2945)
  Bottom Layer w10: v1(1775,2245) 1895,2365 2085,2365 2410,2690 2695,2690 v1(2950,2945)
p0.21: C7.2 R7.2 SW4.2 U1.19 | length 1529.8
  Top Layer w10: U1.19 2246.69,2291.69 2545,2590 2545,2710 v1(2535,2720) ; SW4.2 2635,3180 2660,3155 2660,2950 v1(2655,2945)
  Bottom Layer w10: v1(2535,2720) 2655,2840 v1(2655,2945)
p1.00: IC2.4 U1.27 | length 1613.9
  Top Layer w10: U1.27 1721.14,2547.6 1738.63,2565.08 1738.63,2566.31 1752.32,2580 2255,2580 2295,2540 v1@2295,2505.5 ; v1(2495,2085) 2700.39,2085 2860.39,1925 IC2.4
  Bottom Layer w10: v1(2295,2505) 2295,2275 2482.32,2087.68 2492.32,2087.68 v1(2495,2085)
p1.01: IC2.3 U1.29 | length 1657.8
  Top Layer w10: U1.29 1634.53,2547.6 1652.01,2565.08 1652.01,2566.31 1705.71,2620 2285,2620 v1(2360,2545) ; v1(2670,2115) 2720.39,2115 2860.39,1975 IC2.3
  Bottom Layer w10: v1(2360,2545) 2360,2375 2620,2115 v1(2670,2115)
p1.02: IC2.2 U1.30 | length 1655.1
  Top Layer w10: U1.30 1591.22,2547.6 1608.71,2565.08 1608.71,2566.31 1682.4,2640 2295,2640 2350,2585 2375,2585 2380,2580 ; v1(2725,2145) 2740.39,2145 2860.39,2025 IC2.2
  Bottom Layer w10: 2380,2585 2725,2240 v1(2725,2145)
p1.03: IC2.1 U1.28 | length 1662.5
  Top Layer w10: U1.28 1677.83,2547.6 1695.32,2565.08 1695.32,2566.31 1729.01,2600 2268.94,2600 2319,2549.94 2319,2549.79 2330,2538.79 v1(2330,2535) ; v1(2810,2160) 2830,2160 2888.94,2101.06 IC2.1
  Bottom Layer w10: v1(2330,2535) 2330,2320 2565,2085 2735,2085 v1(2810,2160)
p1.04: U1.33
p1.05: U1.48
RX0: U1.23 U2.2 | length 769.3
  Top Layer w10: v1(1715,2720) 1715,2755 1755,2795 U2.2 ; U1.23 1994.92,2464.92 v1(2020,2490)
  Bottom Layer w10: v1(1715,2720) 1715,2640 1810,2545 1965,2545 v1(2020,2490)
RXI: U1.24 U2.3 | length 526.6
  Top Layer w10: v1(1685,2675) 1685,2770 1760,2845 U2.3 ; U1.24 v1(1855,2510)
  Bottom Layer w10: v1(1685,2675) 1685,2615 1790,2510 v1(1855,2510)
SWCLK: C1.4 U1.31 | length 527.7
  Top Layer w10: C1.4 1420,2896.22 1420,2704.04 1547.91,2576.13 U1.31
SWDIO: C1.3 U1.32 | length 431
  Top Layer w10: C1.3 1335,2891.34 1347.46,2878.87 1347.46,2877.54 1397.52,2827.48 1397.52,2702.48 1504.61,2595.39 U1.32
VBAT: C15.2 C17.2 IC5.5 J3.1 J4.1 R17.2 | length 1382.5
  Top Layer w10: C15.2 1977.81,1660 1992.5,1645.32 1992.5,1637.5 2035,1595 v1(2035,1580) ; v1(2105,1226.5) J3.1
  Top Layer w15: C15.2@1977.81,1660 2020,1702.19 2020,1800.08 2054.92,1835 IC5.5 ; v1(2105,1226.5) 2117.5,1214 2504,1214 J4.1
  Top Layer w20: J4.1 2555,1265 C17.2 R17.2
  Bottom Layer w10: v1(2035,1580) 2035,1375 2105,1305 v1(2105,1226.5)
VCCA: FB1.2
VCCB: C10.1 IC3.1 J3.2 R9.2 R11.2 R12.1 | length 1297.1
  Top Layer w20: R11.2 1337.19,1655 1285,1602.81 1285,1205 1330,1160 1628.74,1160 1691.34,1222.6 IC3.1 1710.26,1223.8 1823.8,1223.8 R9.2 C10.1 2050,1225 J3.2
pads on no net: IC2.5 IC2.6 IC2.7 IC2.9 IC2.10 IC2.11 IC2.12 IC3.4 IC6.4 J1.4 LSEG1.0 LSEG2.0 LSEG3.0 LSEG4.0 RN1.0 RN2.0 U1.2 U1.4 U1.5 U1.8 U1.10 U1.13 U1.15 U1.16 U1.17 U1.26 U1.34 U1.35 U1.36 U1.38 U1.39 U1.40 U1.41 U1.42 U1.43 U1.44 U1.45 U1.47 U1.49 U1.51 U1.52 U1.53 U1.54 U1.55 U2.7 U2.8 U2.9 U2.10 U2.11 U2.12 U2.13 U2.14 U2.15 U3.9

## Polygon pours and split planes (outlines as drawn)
no net on Bottom Layer "NONET_L02_P000" (solid, pour order 0): 1265,1125 1260,1130 1260,3425 4280,3425 4290,3415 4285,3410 4285,1125
no net on Top Layer "NONET_L01_P001" (solid, pour order 1): 4275,1125 4275,3415 4285,3425 1250,3425 1250,1125

## Keep-outs
Top Layer:
  lines w10: 1250,1125 1270,1125 4265,1125 4285,1125 4285,3425 1250,3425 1250,1125
Bottom Layer:
  lines w10: 1260,1130 1260,3425 1265,3425 4285,3425 4285,1125 1265,1125 1260,1130

## Silkscreen, mask and mechanical layers (free items; w line width, h text height)
Top Overlay:
  drawing of 1612 lines, arcs and shapes, not listed
  text "DIO" at 1395,2875.95 h78.74
  text "GND" at 1390,2795.95 h78.74
  text "@Kyuubi / @DuySchool" at 2980,2420 h50
  text "WSN Project" at 2055,2131.32 h60
  text "VER 1.0" at 2055,2050.72 h60
Bottom Overlay:
  text "VBAT" at 2800,1220 h78.74